# EAGLE board RaspberryPiGamingBoard (EAGLE 9.6.2)
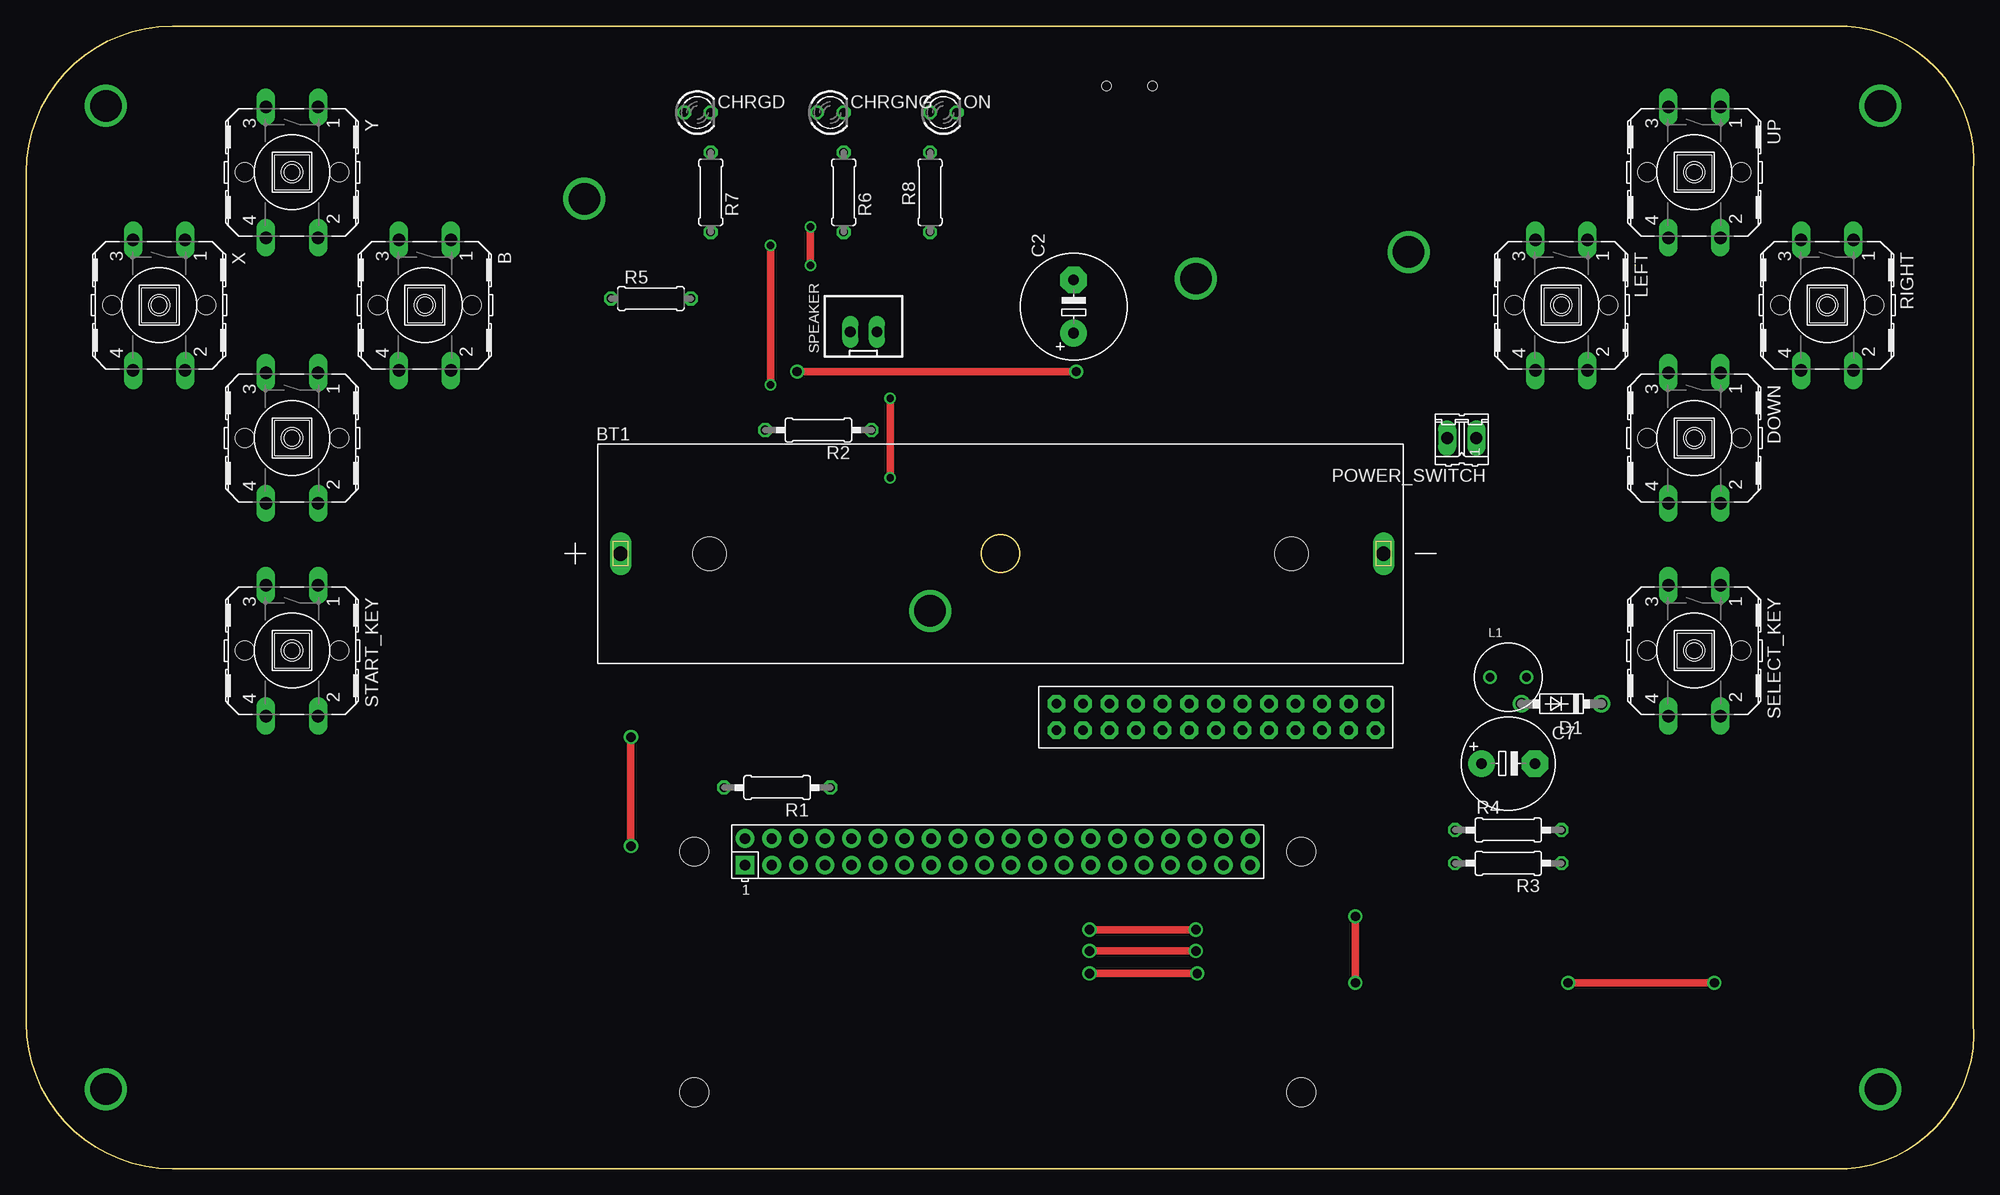
[diagram p0: board, top side]
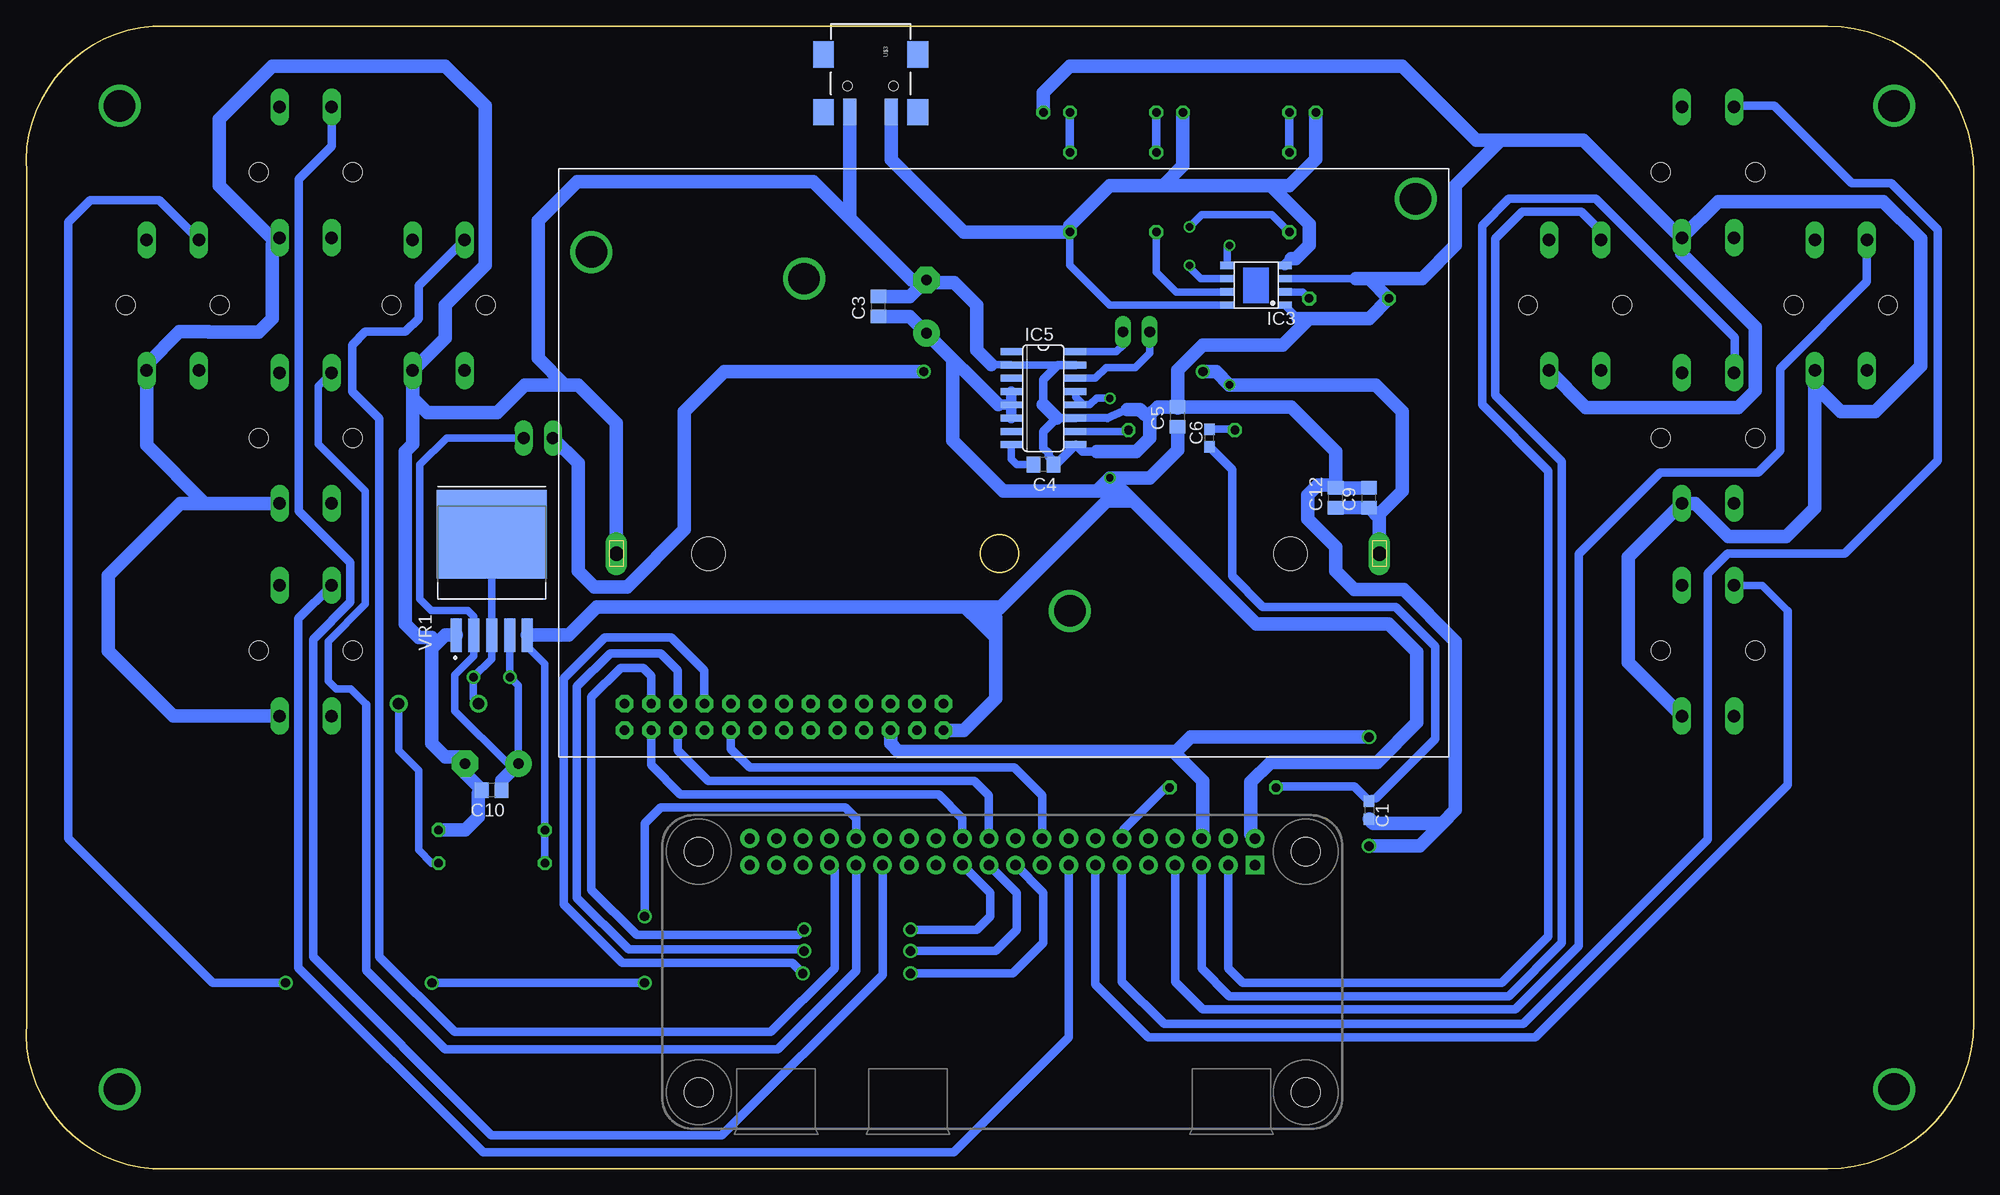
[diagram p1: board, bottom side, seen from below]

Size 186.09 x 109.22 mm. Coordinates in mm from the lower left corner, seen from the top.
Outline: 0,13.97 0,95.25 arc-90 13.97,109.22 173.99,109.22 arc-90 186.06,95.25 186.06,13.97 arc-90 173.99,0 13.97,0 arc-90 0,13.97
Copper layers (1*16): Top 0.035mm / dielectric 1.5mm / Bottom 0.035mm
Design rules "default *": minimum track width 6mil, minimum drill 0.35mm, track to track 16mil, track to pad 16mil, pad to pad 16mil, via to via 16mil, smd to smd 16mil, copper to edge 40mil, drill to drill 6mil, minimum pad ring 10mil, minimum via ring 8mil, stop-mask expansion 4mil, vias tented up to drill 0mil, thermal gap 10mil
Net classes: 0 default: width 0.406 mm; 1 POWER: width 0.711 mm, drill 0.7 mm, clearance 0.25 mm

## Footprints (pad centres in the part's own frame; a part is rotated, then mirrored left to right if it is on the bottom)
B3F-40XX = drill 1.194 long: 1 -6.248,2.489; 2 6.248,2.489; 3 -6.248,-2.489; 4 6.248,-2.489 | hole 1.803: 0,-4.496; 0,4.496
BAT_BK-18650-PC2 = drill 1.38 long: + -36.3,0; - 36.6,0 | hole 3.2: -27.805,0; 27.81,0
C0603 = smd 1.1 x 1: 1 -0.85,0; 2 0.85,0
E5-10,5 = drill 1.016 pad 2.54: + -2.54,0 | drill 1.016 pad 2.54 octagon: - 2.54,0
C0805 = smd 1.3 x 1.5: 1 -0.95,0; 2 0.95,0
E5-8,5 = drill 1.016 pad 2.54: + -2.54,0 | drill 1.016 pad 2.54 octagon: - 2.54,0
LED3MM = drill 0.813 octagon: A -1.27,0; K 1.27,0
DO41-7.6 = drill 1.1 pad 1.7: A 3.81,0; C -3.81,0
SOP-8 = smd 1.3 x 0.7: 1 -2.75,1.905; 2 -2.75,0.635; 3 -2.75,-0.635; 4 -2.75,-1.905; 5 2.75,-1.905; 6 2.75,-0.635; 7 2.75,0.635; 8 2.75,1.905
SOP-16 = smd 0.66 x 2.032: 1 -4.445,-3.073; 2 -3.175,-3.073; 3 -1.905,-3.073; 4 -0.635,-3.073; 5 0.635,-3.073; 6 1.905,-3.073; 7 3.175,-3.073; 8 4.445,-3.073; 9 4.445,3.073; 10 3.175,3.073; 11 1.905,3.073; 12 0.635,3.073; 13 -0.635,3.073; 14 -1.905,3.073; 15 -3.175,3.073; 16 -4.445,3.073
INDUCTOR_INT2-3.5-D6.5XH8.0MM = drill 0.8: 1 -1.75,0; 2 1.75,0
02P = drill 1.143 long: 1 -1.397,0; 2 1.397,0
0207/10 = drill 0.813 octagon: 1 -5.08,0; 2 5.08,0
0207/7 = drill 0.813 octagon: 1 -3.81,0; 2 3.81,0
JST-XH-02-PACKAGE-LONG-PAD = drill 1.016 long: 1 -1.27,0; 2 1.27,0
RASP_PI_ZERO_BOARD_FULL = drill 1 pad 1.778 square: 1 8.37,25.23 | drill 1 pad 1.778: 2 8.37,27.77; 3 10.91,25.23; 4 10.91,27.77; 5 13.45,25.23; 6 13.45,27.77; 7 15.99,25.23; 8 15.99,27.77; 9 18.53,25.23; 10 18.53,27.77; 11 21.07,25.23; 12 21.07,27.77; 13 23.61,25.23; 14 23.61,27.77; 15 26.15,25.23; 16 26.15,27.77; 17 28.69,25.23; 18 28.69,27.77; 19 31.23,25.23; 20 31.23,27.77; 21 33.77,25.23; 22 33.77,27.77; 23 36.31,25.23; 24 36.31,27.77; 25 38.85,25.23; 26 38.85,27.77; 27 41.39,25.23; 28 41.39,27.77; 29 43.93,25.23; 30 43.93,27.77; 31 46.47,25.23; 32 46.47,27.77; 33 49.01,25.23; 34 49.01,27.77; 35 51.55,25.23; 36 51.55,27.77; 37 54.09,25.23; 38 54.09,27.77; 39 56.63,25.23; 40 56.63,27.77 | hole 2.75: 3.5,3.5; 3.5,26.5; 61.5,3.5; 61.5,26.5
3.5INCH_RPI_LCD = drill 0.9 pad 1.676 octagon: 1 48.26,5.08; 2 48.26,2.54; 3 50.8,5.08; 4 50.8,2.54; 5 53.34,5.08; 6 53.34,2.54; 7 55.88,5.08; 8 55.88,2.54; 9 58.42,5.08; 10 58.42,2.54; 11 60.96,5.08; 12 60.96,2.54; 13 63.5,5.08; 14 63.5,2.54; 15 66.04,5.08; 16 66.04,2.54; 17 68.58,5.08; 18 68.58,2.54; 19 71.12,5.08; 20 71.12,2.54; 21 73.66,5.08; 22 73.66,2.54; 23 76.2,5.08; 24 76.2,2.54; 25 78.74,5.08; 26 78.74,2.54
USB(POWER) = smd 2.54 x 1.27: GND 2.5,-1.981; VBUS 2.5,1.981 | smd 2.5 x 2: GND@1 -3,-4.5; GND@2 -3,4.5; GND@3 2.5,4.5; GND@4 2.5,-4.5 | hole 0.9: 0,2.2; 0,-2.2
DPAK170P1435X465-6N = smd 3.21 x 1.05: 1 -6.13,3.4; 2 -6.13,1.7; 3 -6.13,0; 4 -6.13,-1.7; 5 -6.13,-3.4 | smd 8.46 x 10.53: 6 3.5,0

## Placement (x,y rotation side)
A  [B3F-40XX]  25.4,69.85 270 top
B  [B3F-40XX]  38.1,82.55 270 top
BT1  BK-18650-PC2  [BAT_BK-18650-PC2]  93.09,58.8 0 top
C1  0.1u  [C0603]  57.78,34.29 270 bottom
C2  470u  [E5-10,5]  100.08,82.42 90 top
C3  1u  [C0805]  104.65,82.42 90 bottom
C4  0.1u  [C0805]  88.9,67.31 180 bottom
C5  1u  [C0805]  76.07,71.88 90 bottom
C6  0.47u  [C0603]  73.03,69.85 90 bottom
C7  47u  [E5-8,5]  141.6,38.73 0 top
C9  0.1u  [C0805]  57.78,64.14 90 bottom
C10  1u  [C0805]  141.6,36.2 180 bottom
C12  10u  [C0805]  60.96,64.14 90 bottom
CHRGD  LED3MM  [LED3MM]  64.14,100.97 0 top
CHRGNG  LED3MM  [LED3MM]  76.83,100.97 0 top
D1  1N5819-B  [DO41-7.6]  146.69,44.45 180 top
DOWN  [B3F-40XX]  159.38,69.85 270 top
IC3  TP4056  [SOP-8]  68.58,84.45 180 bottom
IC5  PAM8403  [SOP-16]  88.9,73.66 270 bottom
L1  33uH  [INDUCTOR_INT2-3.5-D6.5XH8.0MM]  141.6,46.99 0 top
LEFT  [B3F-40XX]  146.69,82.55 270 top
ON  LED3MM  [LED3MM]  87.63,100.97 0 top
POWER_SWITCH  [02P]  137.16,69.85 180 top
R1  150  [0207/10]  71.75,36.45 180 top
R2  20k  [0207/10]  75.69,70.61 180 top
R3  6.8k  [0207/10]  141.6,29.21 180 top
R4  2.2k  [0207/10]  141.6,32.38 0 top
R5  10K  [0207/7]  59.69,83.19 0 top
R6  1K  [0207/7]  78.11,93.34 270 top
R7  1K  [0207/7]  65.41,93.34 270 top
R8  1K  [0207/7]  86.36,93.34 90 top
RIGHT  [B3F-40XX]  172.09,82.55 270 top
SELECT_KEY  [B3F-40XX]  159.38,49.53 270 top
SPEAKER  SPEAKER  [JST-XH-02-PACKAGE-LONG-PAD]  80.01,80.01 0 top
START_KEY  [B3F-40XX]  25.4,49.53 270 top
U$1  RPI-ZERO  [RASP_PI_ZERO_BOARD_FULL]  60.33,3.81 0 top
U$2  [3.5INCH_RPI_LCD]  50.16,39.37 0 top
U$3  USB(POWER)  [USB(POWER)]  105.41,103.5 270 bottom
UP  [B3F-40XX]  159.38,95.25 270 top
VR1  XL6009  [DPAK170P1435X465-6N]  141.6,57.15 90 bottom
X  [B3F-40XX]  12.7,82.55 270 top
Y  [B3F-40XX]  25.4,95.25 270 top

## Library data of the parts
A B DOWN LEFT RIGHT SELECT_KEY START_KEY UP X Y = adafruit; MF: OMRON COMPONENTS USA; MPN: B3F-4000; OC_FARNELL: 176434; OC_NEWARK: 36K3105
BT1 = BK-18650-PC2; AVAILABILITY: In Stock; DESCRIPTION: Battery Holder (Open) 18650 1 Cell PC Pin; MF: MPD (Memory Protection Devices); MP: BK-18650-PC2; PACKAGE: None; PRICE: None; PURCHASE-URL: https://pricing.snapeda.com/search/part/BK-18650-PC2/?ref=eda
C1 C3-C6 U$3 = CEDT_JANUARY_2015_v5
C2 = rcl; SPICEPREFIX: C
C7 L1 = BeagleBone_Blue_R3
C9 C10 C12 POWER_SWITCH U$2 = CEDT_JANUARY_2015_v6
CHRGD CHRGNG = Arduino_Hackathon_v5; OC_FARNELL: unknown
D1 = diode
IC3 = tp4056; OC_FARNELL: unknown
IC5 = PAM8403
ON = CEDT; OC_FARNELL: unknown
R1-R4 = rcl; SPICEPREFIX: R
R5-R8 = CEDT_JANUARY_2015_v5; OC_FARNELL: unknown
SPEAKER = Rembrandt Electronics - JST XH Connectors v1-0
U$1 = rpi-zero
VR1 = XL6009; AVAILABILITY: Not in stock; MF: XLSEMI; MP: XL6009; PACKAGE: Package; PRICE: None

## Nets
+5V [POWER]: C2.+ C3.1 C5.1 IC5.4 IC5.5 IC5.6 IC5.12 IC5.13 R3.2 R4.1 U$1.2 U$2.2 VR1.5
BATTERY_IN+: BT1.+ C9.1 C12.1 IC3.5 POWER_SWITCH.2
FILTERED_PWM: C1.1 C6.1 R1.2
GND: A.2 B.2 BT1.- C1.2 C2.- C3.2 C4.1 C5.2 C7.- C9.2 C10.2 C12.2 DOWN.2 IC3.1 IC3.3 IC5.2 IC5.9 IC5.11 IC5.15 LEFT.2 ON.K R4.2 R5.1 RIGHT.2 SELECT_KEY.2 START_KEY.2 U$1.6 U$2.6 U$3.GND UP.2 VR1.1 X.2 Y.2
GPIO2: A.3 U$1.3
GPIO3: B.3 U$1.5
GPIO4: U$1.7 X.3
GPIO5: U$1.29 UP.3
GPIO6: DOWN.3 U$1.31
GPIO8: U$1.24 U$2.24
GPIO9: U$1.21 U$2.21
GPIO10: U$1.19 U$2.19
GPIO11: U$1.23 U$2.23
GPIO12: RIGHT.3 U$1.32
GPIO13: LEFT.3 U$1.33
GPIO17: U$1.11 Y.3
GPIO18: R1.1 U$1.12
GPIO22: SELECT_KEY.3 U$1.15
GPIO24: U$1.18 U$2.18
GPIO25: U$1.22 U$2.22
GPIO27: START_KEY.3 U$1.13
N$1: IC5.16 SPEAKER.2
N$2: D1.A L1.2 VR1.3 VR1.6
N$3: D1.C R3.1
N$5: IC5.14 SPEAKER.1
N$6: IC3.2 R5.2
N$7: C4.2 IC5.8
N$8: C6.2 R2.2
N$10: IC5.10 R2.1
N$14: CHRGNG.K R6.1
N$15: CHRGD.K R7.1
N$16: IC3.7 R6.2
N$17: IC3.6 R7.2
N$18: C7.+ C10.1 L1.1 POWER_SWITCH.1 VR1.2 VR1.4
N$22: ON.A R8.2
USB_VCC: CHRGD.A CHRGNG.A IC3.4 IC3.8 R8.1 U$3.VBUS

## Tracks (layer width: path | path; a pad name or v marks a point on that pad's centre or on a via)
+5V  (via drill 0.7 pad 0.85)
  Top 0.711: v82.55,73.66 v82.55,66.04
  Bottom 0.711: 85.09,73.03 85.83,73.76 IC5.13 | R3.2 R4.1 136.53,48.26 138.21,49.94 VR1.5 | 85.09,73.03 84.45,73.03 83.82,73.66 v82.55,73.66 | 85.09,73.03 IC5.12
  Bottom 1.016: IC5.5 IC5.6 | IC5.5 93.22,73.03 | IC5.5 IC5.4
  Bottom 1.27: C3.1 101.67,81.47 C2.+ | 93.22,73.03 C2.+ | U$1.2 69.08,31.96 69.08,36.97 67.18,38.86 57.02,38.86 53.21,42.67 53.21,49.4 55.88,52.07 68.58,52.07 80.33,63.82 | C5.1 76.07,68.71 78.74,66.04 v82.55,66.04 | v82.55,66.04 83.82,64.77 | 83.82,64.77 81.92,64.77 82.87,63.82 | 83.82,64.77 92.71,64.77 97.54,69.6 97.54,77.34 C2.+ | 80.33,63.82 v82.55,66.04 | 82.87,63.82 93.09,53.59 93.22,53.72 94.49,53.72 | 93.47,52.7 93.47,50.8 | 93.47,50.8 93.47,44.96 96.52,41.91 U$2.2 | VR1.5 134.27,51.02 131.57,53.72 96.39,53.72 | 94.49,53.72 96.39,53.72 | 80.33,63.82 82.87,63.82 | 93.47,50.8 95,52.32 | 95,52.32 96.39,53.72 | 93.47,52.7 94.49,53.72 | 95,52.32 93.98,52.32 | 93.98,52.32 93.85,52.32 93.47,52.7 | 94.49,53.72 94.49,52.83 93.98,52.32
BATTERY_IN+  (via drill 0.7 pad 0.85, 0.9)
  Top 0.711: v71.12,88.27 v71.12,74.93 | v73.66,76.2 v100.33,76.2
  Bottom 0.711: IC3.5 71.33,88.06 v71.12,88.27
  Bottom 1.27: BT1.+ 56.79,62.19 | 56.79,62.19 C9.1 C12.1 | 56.79,62.19 56.79,62.59 54.61,64.77 54.61,72.39 57.15,74.93 v71.12,74.93 72.39,76.2 v73.66,76.2 | POWER_SWITCH.2 133.35,67.44 133.35,57.15 131.83,55.63 128.67,55.63 123.19,61.11 123.19,72.39 119.38,76.2 v100.33,76.2
FILTERED_PWM
  Bottom 0.711: R1.2 66.59,36.54 | C1.1 57.53,35.39 57.15,35.39
  Bottom 0.813: 66.59,36.54 59.18,36.54 C1.1 | 57.15,35.39 51.44,41.11 51.44,49.91 55.24,53.72 67.94,53.72 70.87,56.64 70.87,66.84 C6.1
GND  (via drill 0.9 pad 0.9)
  Top 0.711: v57.78,30.86 v57.78,41.27
  Bottom 0.711: 93.88,76.86 92,76.86 IC5.2 87.5,76.83 | 100.08,84.71 C2.- | 80.89,72.58 81.29,72.41 | C5.2 76.07,72.72 | 87.73,67.31 C4.1 | C10.2 142.88,35.88 | 57.78,85.09 59.05,85.09 IC3.3 | X.2 15.24,76.25 15.24,74.93 | 64.56,81.28 IC3.1
  Bottom 0.762: 82.78,71.75 IC5.11
  Bottom 0.813: 81.29,72.41 82.78,71.75 | IC5.15 87.5,76.83 88.9,75.44 88.9,73.03 | 83.82,68.58 85.19,68.58 IC5.9 87.68,67.36 | 87.68,67.36 87.73,67.31 | 87.68,67.36 88.39,68.07 88.39,68.4 88.9,68.91 88.9,70.48 87.63,71.75 IC5.11
  Bottom 1.27: 78.74,72.07 77.98,72.83 C5.2 65.21,72.83 60.96,68.58 C12.2 | 142.88,35.88 142.88,33.66 144.15,32.38 R4.2 | 59.05,85.09 52.7,85.09 49.53,88.27 49.53,93.98 45.19,98.32 | 57.78,85.09 R5.1 57.78,81.28 63.5,81.28 | 107.39,90.88 U$3.GND | 107.39,90.88 101.47,84.96 C2.- 101.67,83.37 C3.2 | 78.74,72.07 78.74,69.85 80.01,68.58 83.82,68.58 | 63.5,81.28 64.56,81.28 | ON.K 88.9,102.87 86.36,105.41 54.61,105.41 47.52,98.32 45.19,98.32 | START_KEY.2 33.02,48.41 33.02,58.47 A.2 26.62,63.6 23.44,60.43 17.91,60.43 15.19,63.14 X.2 | Y.2 24.43,92.46 8.64,92.46 5.08,88.9 5.08,76.71 9.4,72.39 12.7,72.39 15.24,74.93 | Y.2 27.89,87.47 20.87,80.45 20.87,74.39 22.49,72.77 37.06,72.77 B.2 | SELECT_KEY.2 172.03,43.28 178.26,49.51 178.26,56.69 171.35,63.6 169.01,63.6 | 107.39,90.88 110.87,94.36 133.45,94.36 137.16,90.65 137.16,77.47 134.62,74.93 | 78.74,72.07 79.18,72.07 79.69,72.58 80.89,72.58 | Y.2 28.02,89 37.34,98.32 45.19,98.32 | U$2.6 103.5,40.64 102.74,39.88 76.2,39.88 | v57.78,41.27 74.8,41.27 76.2,39.88 | 76.2,39.88 76.33,39.75 73.66,37.08 73.66,31.7 U$1.6 | 63.5,81.28 66.04,78.74 73.66,78.74 76.07,76.33 76.07,72.72 | C12.2 61.21,65.34 62.68,65.34 63.63,64.39 63.63,62.1 60.96,59.44 60.96,57.15 59.18,55.37 54.48,55.37 49.53,50.42 49.53,34.29 50.8,33.02 | 50.8,33.02 57.37,33.02 C1.2 | 50.8,33.02 52.96,30.86 v57.78,30.86 | 169.01,63.6 174.57,69.16 RIGHT.2 174.57,76.89 171.45,80.01 168.66,80.01 168.65,80 163.84,80 162.56,81.28 162.56,88.32 UP.2 161.87,88.95 162.61,88.95 167.64,93.98 167.64,100.33 162.56,105.41 146.05,105.41 142.24,101.6 142.24,86.36 146.05,82.55 146.05,79.43 LEFT.2 149.17,73.66
  Bottom 1.27: DOWN.2 169.01,63.6 | 149.17,73.66 147.78,72.26 141.1,72.26 138.43,74.93 134.62,74.93 | 149.17,73.66 149.17,69.27 149.86,68.58 149.86,52.07 148.59,50.8 147.32,50.8 146.79,50.27 | 87.63,71.75 88.9,73.03 | C9.2 C12.2 | 146.79,50.27 147.32,49.75 147.32,40.64 146.05,39.37 144.78,39.37 C7.- 144.15,37.78 C10.2 | 93.88,76.86 95.25,78.23 95.25,82.55 97.41,84.71 100.08,84.71 | 134.62,74.93 133.35,74.93 129.69,71.27 BT1.- | VR1.1 146.05,51.02 146.79,50.27
GPIO2
  Bottom 0.711: 22.86,76.15 A.3
  Bottom 0.813: U$1.3 71.23,19.16 69.85,17.78 45.09,17.78 40.64,22.23 40.64,66.67 46.99,73.03 46.99,90.17 44.45,92.71 36.11,92.71 22.86,79.46 22.86,76.15
GPIO3
  Bottom 0.711: B.3 35.61,89.56
  Bottom 0.813: U$1.5 73.78,19.16 71.12,16.51 44.45,16.51 39.37,21.59 39.37,67.62 45.72,73.97 45.72,88.9 43.16,91.47 37.52,91.47 35.61,89.56
GPIO4
  Bottom 0.813: U$1.7 76.31,17.89 73.66,15.24 43.81,15.24 37.76,21.3 37.76,58.76 29.97,66.55 20.61,66.55 18.5,68.66 18.5,76.49 10.21,84.78 X.3
GPIO5
  Bottom 0.813: U$1.29 104.25,18.55 119.61,3.2 141.63,3.2 158.68,20.25 158.68,50.62 155.13,54.17 155.13,57.98 160.02,62.87 160.02,94.61 156.9,97.74 UP.3
GPIO6
  Bottom 0.711: DOWN.3 158.17,74.83 158.17,69.27 153.67,64.77 153.67,53.96 157.23,50.41 157.23,46.62 156.45,45.85 155.07,45.85 153.61,44.39
  Bottom 0.813: U$1.31 106.8,18.93 114.3,11.43 146.05,11.43 153.61,18.99 153.61,44.39
GPIO8
  Bottom 0.813: U$2.24 126.36,38.58 123.57,35.79 98.91,35.79 96.64,33.52 U$1.24
GPIO9  (via drill 0.9)
  Top 0.711: v101.6,20.83 v111.76,20.83
  Bottom 0.813: U$1.21 91.44,26.39 91.44,22.86 93.47,20.83 v101.6,20.83 | v111.76,20.83 111.89,20.95 128.52,20.95 133.48,25.91 133.48,46.1 130.3,49.28 125.48,49.28 123.83,47.62 U$2.21
GPIO10  (via drill 0.9)
  Top 0.711: v101.6,18.67 v111.89,18.67
  Bottom 0.813: U$1.19 88.9,26.39 88.9,21.59 91.82,18.67 v101.6,18.67 | v111.89,18.67 112.9,19.68 129.16,19.68 134.75,25.27 134.75,46.86 130.81,50.8 124.46,50.8 121.28,47.62 U$2.19
GPIO11  (via drill 0.9)
  Top 0.711: v101.6,22.86 v111.76,22.86
  Bottom 0.813: U$1.23 93.98,26.39 93.98,24.13 95.25,22.86 v101.6,22.86 | v111.76,22.86 112.27,22.35 127.76,22.35 132.08,26.67 132.08,45.09 129.29,47.88 127.13,47.88 126.36,47.12 U$2.23
GPIO12  (via drill 0.9, 0.9 pad 0.9)
  Top 0.711: v127,24.13 v127,17.78 | v147.32,17.78 v161.29,17.78
  Bottom 0.813: U$1.32 106.8,33.52 107.82,34.54 125.48,34.54 127,33.02 v127,24.13 | RIGHT.3 173.38,92.58 179.96,92.58 182.07,90.47 182.07,31.57 168.28,17.78 v161.29,17.78 | v127,17.78 v147.32,17.78
GPIO13
  Bottom 0.813: U$1.33 108.84,28.54 108.84,19.18 114.94,13.08 145.16,13.08 152.36,20.28 152.36,71.72 154.94,74.3 154.94,78.75 153.68,80.01 149.86,80.01 148.59,81.28 148.59,84.4 LEFT.3
GPIO17
  Bottom 0.813: U$1.11 81.39,17.89 77.34,13.84 43.05,13.84 25.4,31.5 25.4,56.9 23.5,58.8 12.32,58.8 3.43,67.69 3.43,89.79 7.87,94.23 11.68,94.23 19.05,101.6 22.81,101.6 Y.3
GPIO18
  Bottom 0.711: R1.1 77.22,36.45 | U$1.12 81.28,31.7 81.28,32.38
  Bottom 0.813: 81.28,32.38 77.22,36.45
GPIO22
  Bottom 0.813: U$1.15 86.47,12.59 97.48,1.57 142.42,1.57 160.07,19.23 160.07,52.6 SELECT_KEY.3
GPIO24
  Bottom 0.711: U$1.18 89.03,31.59
  Bottom 0.813: 89.03,31.59 89.03,35.69 91.69,38.35 116.97,38.35 118.75,40.13 U$2.18
GPIO25
  Bottom 0.813: U$1.22 94.09,35.67 95.5,37.08 120.9,37.08 123.83,40.01 U$2.22
GPIO27
  Bottom 0.711: 17.78,53.34 20.22,55.78 START_KEY.3
  Bottom 0.813: U$1.13 83.94,17.64 78.87,12.57 41.91,12.57 17.78,36.7 17.78,53.34
N$1
  Bottom 0.711: SPEAKER.2 81.28,78.74 81.92,78.11 IC5.16
N$2
  Bottom 0.711: VR1.6 VR1.3 141.6,48.74 L1.2 143.38,46.96 143.38,44.96 D1.A
N$3
  Bottom 0.711: D1.C 150.5,40.01 148.59,38.1 148.59,30.48 147.32,29.21 R3.1
N$4  (via drill 3)
  other vias: 7.62,7.62
N$5
  Bottom 0.711: SPEAKER.1 78.74,77.98 80.13,76.59 82.9,76.59 83.92,75.56 IC5.14
N$6
  Bottom 0.711: R5.2 64.14,83.82 IC3.2
N$7
  Bottom 0.711: C4.2 91.44,67.31 91.97,67.84 IC5.8
N$8
  Bottom 0.711: R2.2 70.7,70.7 C6.2
N$9  (via drill 3)
  other vias: 7.62,101.6
N$10
  Bottom 0.711: R2.1 80.9,70.48 IC5.10
N$11  (via drill 3)
  other vias: 177.16,7.62
N$12  (via drill 3)
  other vias: 177.16,101.6
N$13  (via drill 3)
  other vias: 86.36,53.34
N$14
  Bottom 0.813: CHRGNG.K R6.1
N$15
  Bottom 0.813: CHRGD.K R7.1
N$16
  Bottom 0.711: IC3.7 76.2,83.82 78.11,85.72 R6.2
N$17  (via drill 0.7 pad 0.9)
  Top 0.711: v74.93,90.04 v74.93,86.36
  Bottom 0.711: R7.2 67.06,91.19 73.79,91.19 v74.93,90.04 | IC3.6 73.87,85.09 74.93,86.15 v74.93,86.36
N$18
  Bottom 0.711: VR1.4 139.91,47.04 L1.1 139.06,46.2 C7.+ 140.07,38.73 145.12,43.78 145.12,47.23 143.31,49.04 VR1.2 143.31,52.78 143.91,53.39 147.37,53.39 148.46,54.48 148.46,67.31 145.92,69.85 POWER_SWITCH.1
  Bottom 1.27: C7.+ 140.66,37.15 C10.1
N$20  (via drill 3)
  other vias: 53.34,92.71
N$21  (via drill 3)
  other vias: 132.08,87.63
N$22
  Bottom 0.813: ON.A R8.2
N$25  (via drill 3)
  other vias: 111.76,85.09
USB_VCC
  Bottom 0.711: 86.36,90.17 R8.1 86.36,86.36 82.55,82.55 IC3.8
  Bottom 1.016: 65.19,87 IC3.4
  Bottom 1.27: U$3.VBUS 103.43,96.44 96.52,89.53 R8.1 | 77.47,93.98 82.55,93.98 86.36,90.17 | 67.18,93.98 77.47,93.98 | 67.18,93.98 63.5,90.3 63.5,88.27 64.77,87 65.19,87 | 67.18,93.98 65.41,93.98 62.87,96.52 CHRGD.A | CHRGNG.A 75.56,95.89 77.47,93.98